# Allegro board mid.brd
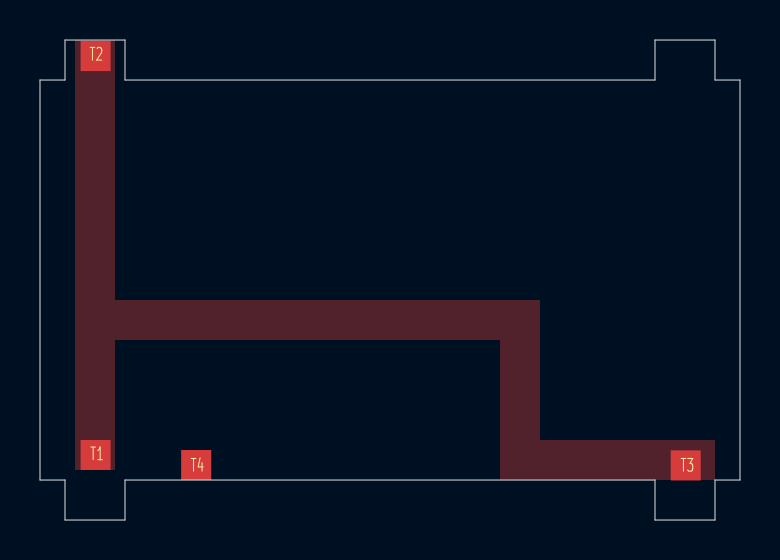
[diagram p0: board, top side]
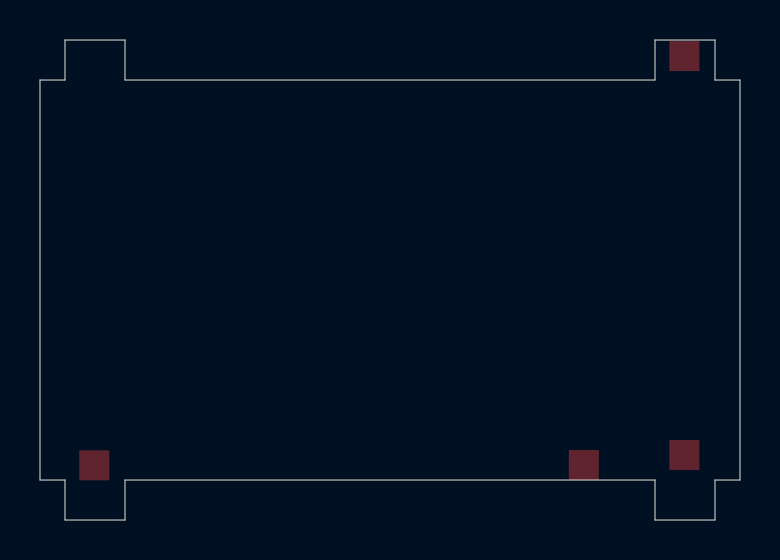
[diagram p1: board, bottom side, seen from below]

Outline 35 x 24 mm; copper layers: TOP, BOTTOM. Coordinates in mm from the lower left corner of the outline.
Outline path: 0,22 0,2 1.25,2 1.25,0 4.25,0 4.25,2 30.75,2 30.75,0 33.75,0 33.75,2 35,2 35,22 33.75,22 33.75,24 30.75,24 30.75,22 4.25,22 4.25,24 1.25,24 1.25,22 0,22

## Placement (name value [footprint] x y rotation side)
T1  TEST  [TP1_5X1_5]  2.78 3.25 0 top
T2  TEST  [TP1_5X1_5]  2.78 23.2 0 top
T3  TEST  [TP1_5X1_5]  32.29 2.73 0 top
T4  TEST  [TP1_5X1_5]  7.81 2.75 0 top

## Library data of the parts
T1-T4 = TEST

## Footprints (pads in the part's own frame, mm; a bottom-side part is the same pattern mirrored in y, then rotated)
TP1_5X1_5
  rect 1.5x1.5 smd: 1(0,0)

## Nets
GND: T4.1(TP)
ANT: T1.1(TP) T2.1(TP) T3.1(TP)

## Copper pours and planes (outline as drawn; the poured copper is in the pictures)
ANT on TOP: 1.75,24 3.75,24 3.75,11 25,11 25,4 33.75,4 33.75,2 23,2 23,9 3.75,9 3.75,2.5 1.75,2.5
